# Altium PCB Room1.PcbDoc (part 1 of 2)
Units mil, origin at the board's own origin, x right, y up, seen from the top; angles counter-clockwise.
Board outline 3937.01 x 3937.01 mil, 2 copper layers (Top Layer, Bottom Layer); 51 components, 61 nets, 285 pads, 40 vias.
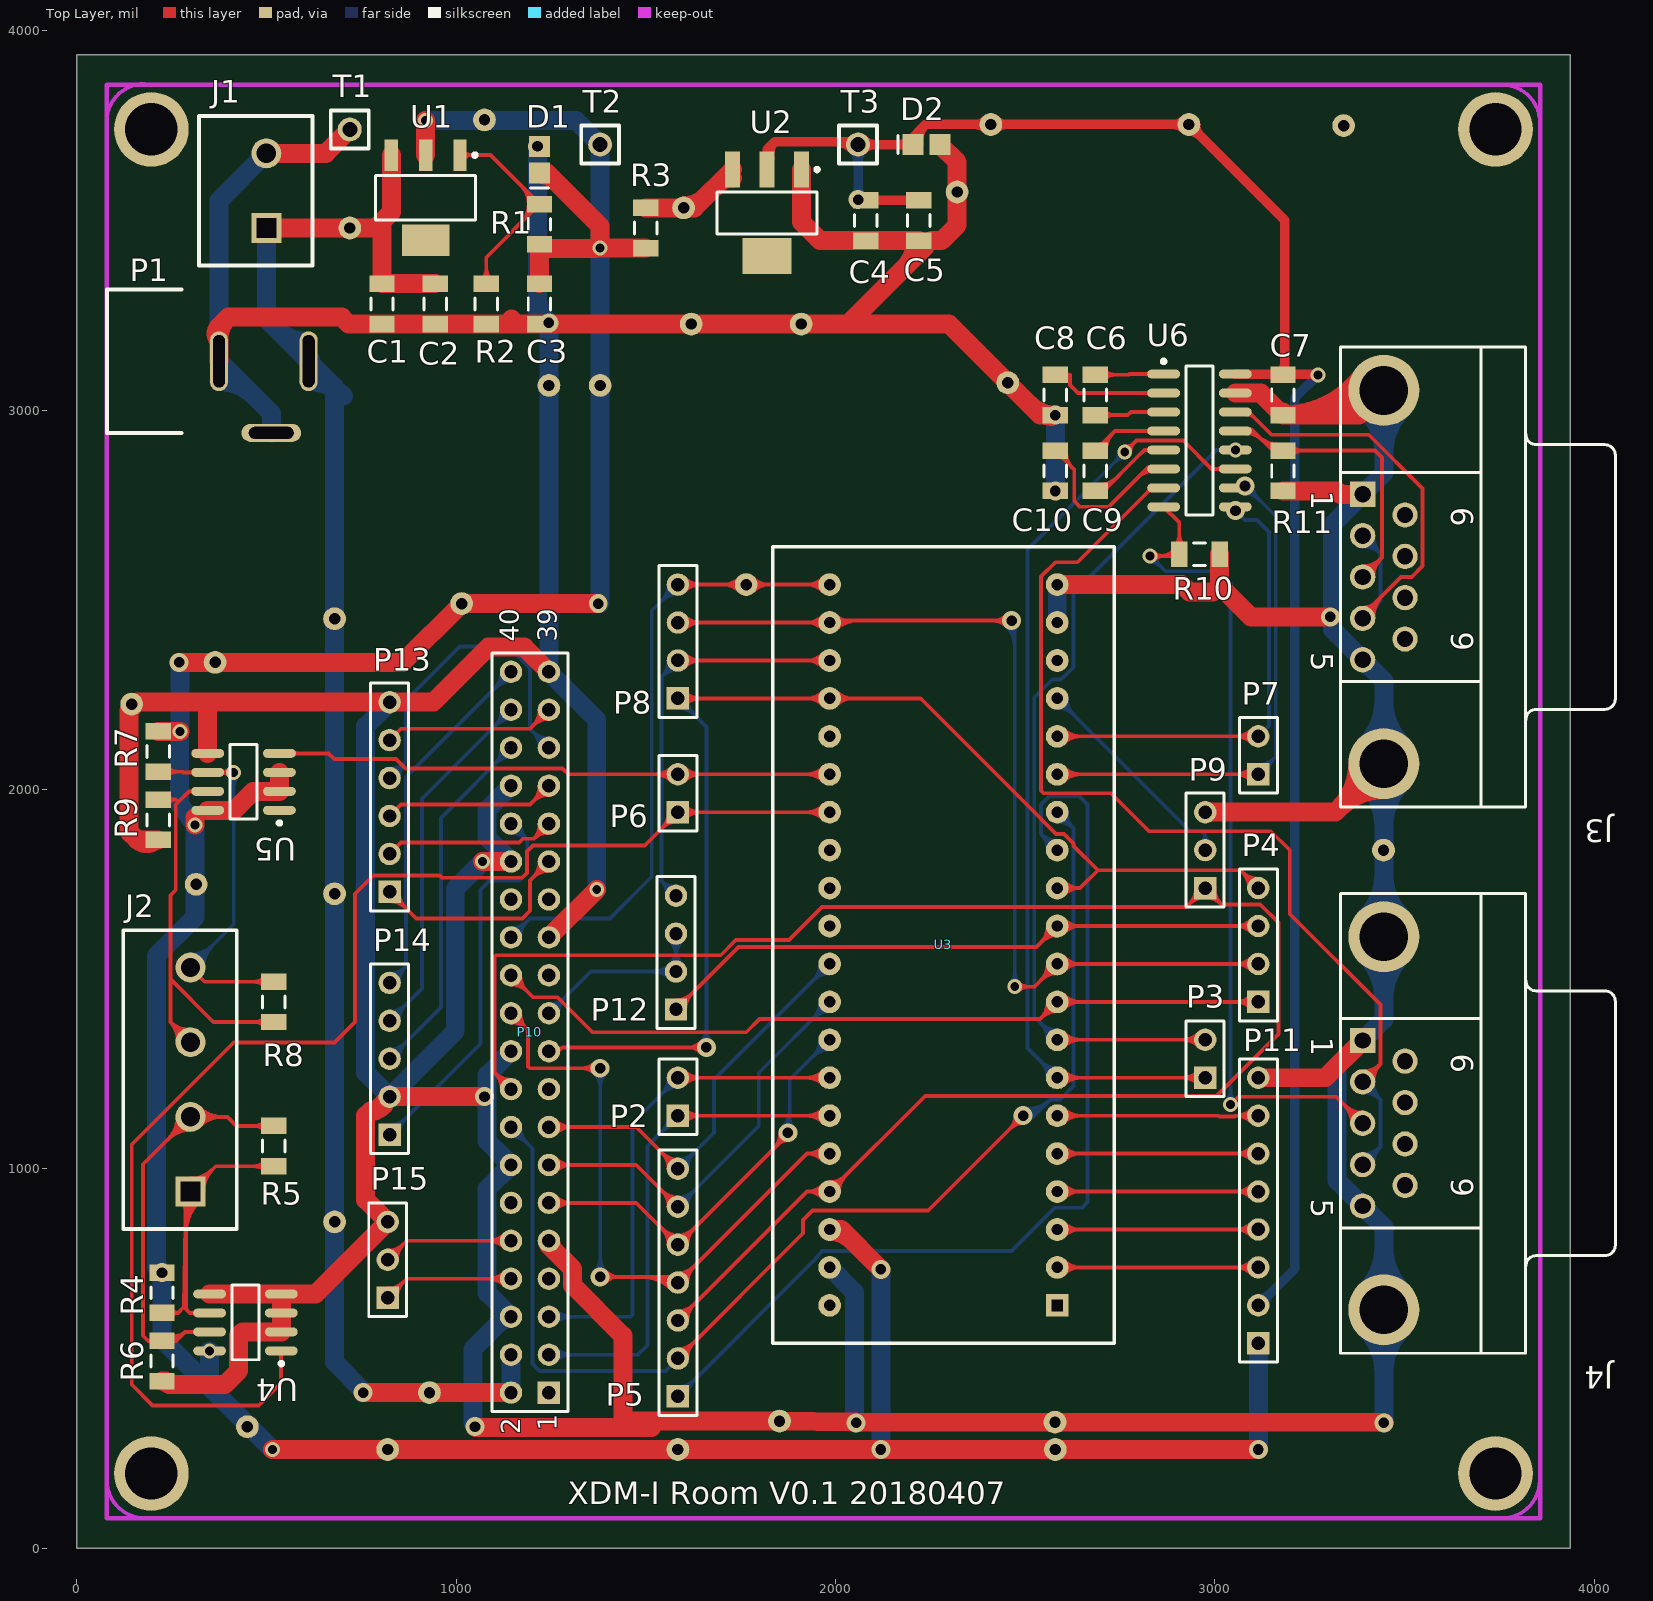
[diagram p0: Top Layer view]
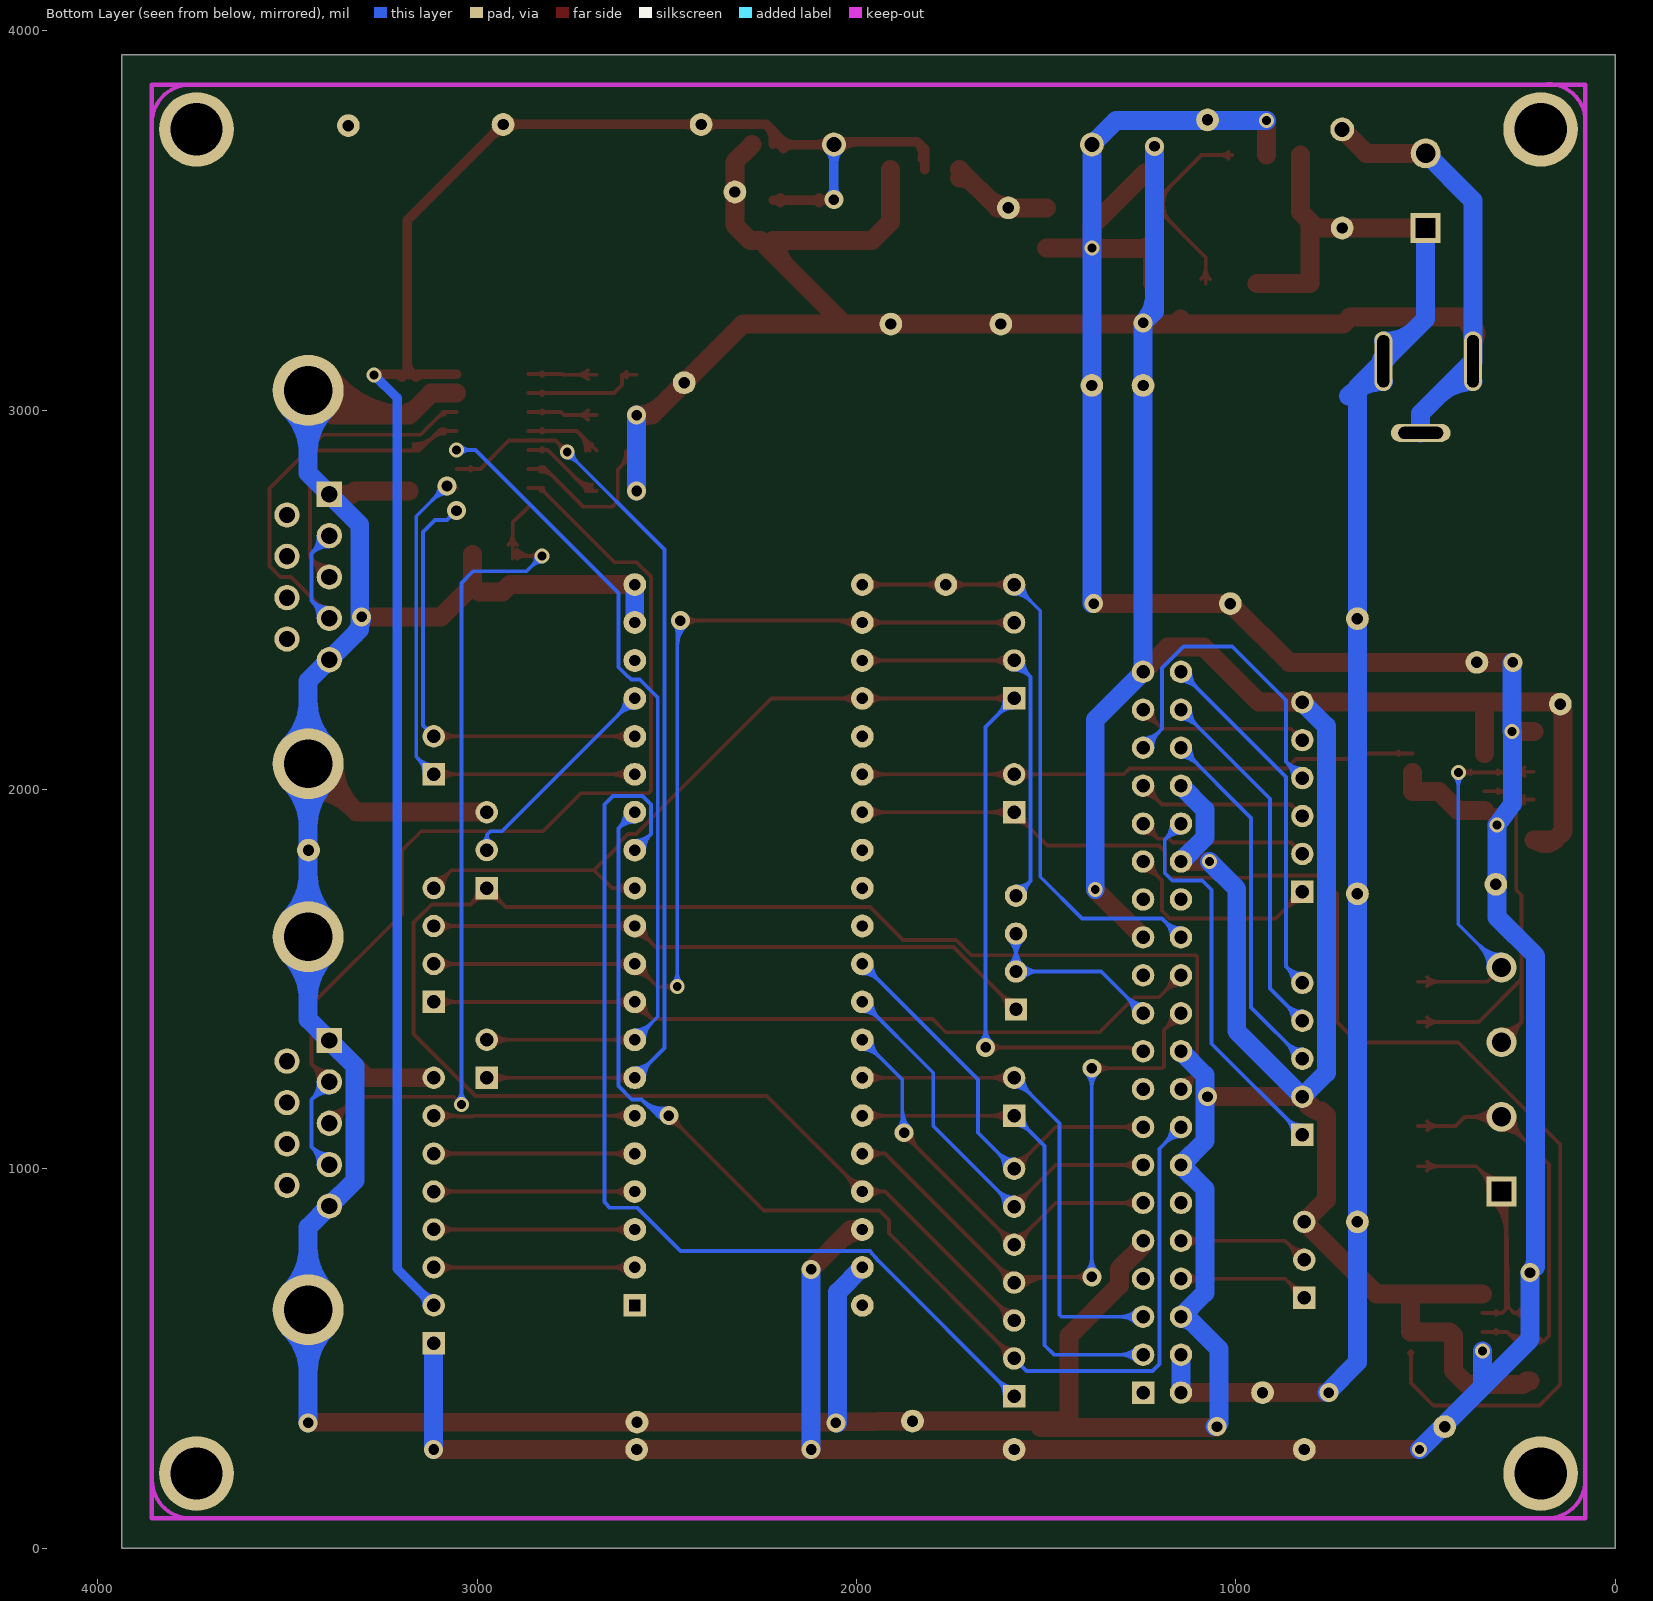
[diagram p1: Bottom Layer view, seen from below]

## Layer stack, top to bottom
Top Layer: signal copper 1.4
Dielectric: dielectric 12.6, FR-4, Dk 4.8
Bottom Layer: signal copper 1.4

## Board outline
0,0 3937.01,0 3937.01,3937.01 0,3937.01

## Design rules (kind name [scope] priority, off if disabled: settings)
Clearance [All] p1: gap=7.87
DiffPairsRouting [All] p1: maxlimit=10 minlimit=10 mostfreqgap=10 maxuncoupledlength=500
HoleSize [All] p1: absolutevalues=TRUE maxlimit=500 minlimit=1 maxpercent=80.000 minpercent=20.000
PolygonConnect [All] p1: connectstyle=Relief reliefconductorwidth=10 reliefentries=4 polygonreliefangle="90 Angle"
RoutingVias [All] p1: holewidth=23.62 width=39.37 viastyle="Through Hole" minholewidth=28 minwidth=50 maxholewidth=28 maxwidth=50
SilkscreenOverComponentPads [All] p1: minsilkscreentomaskgap=5
SolderMaskExpansion [All] p1: expansion=4
Width Width_4 [InNet('DC5')] p1: maxlimit=50 minlimit=10 preferedwidth=50
Width Width_3 [InNet('VCC3.3')] p2: maxlimit=50 minlimit=10 preferedwidth=25
Width Width_2 [InNet('GND')] p3: maxlimit=50 minlimit=10 preferedwidth=50
Width Width_1 [InNet('VCC5')] p4: maxlimit=50 minlimit=10 preferedwidth=50
Width [All] p5: maxlimit=50 minlimit=10 preferedwidth=10
25 further rules are at their usual default settings.

## Classes and differential pairs
component class Room485: J2 R4 R5 R6 R7 R8 R9 U4 U5
component class Power1: C1 C2 C3 C4 C5 D1 D2 J1 P1 R1 R2 R3 T1 T2 T3 U1 U2
component class Raspi: P10 P13 P14 P15
component class STM32F103: C6 C7 C8 C9 C10 J3 J4 P2 P3 P4 P5 P6 P7 P8 P9 P11 P12 R10 R11 S1 U3 U6
differential pair CON2: +CON2_P -CON2_N
differential pair CON1: +CON1_P -CON1_N

## Components (designator, comment, footprint, x,y, rotation, side; value= is the part's Value field where it differs from the comment)
C1 "Cap Semi" CAPC3216L 805,3280 r90 top
C2 "Cap Semi" CAPC3216L 945,3280 r90 top
C3 "Cap Semi" CAPC3216L 1220,3280 r90 top
C4 "Cap Semi" CAPC3216L 2080,3500 r90 top
C5 "Cap Semi" CAPC3216L 2220,3500 r90 top
C6 "Cap Semi" CAPC3216L 2685,3040 r270 top
C7 "Cap Semi" CAPC3216L 3180,3040 r270 top
C8 "Cap Semi" CAPC3216L 2580,3040 r90 top
C9 "Cap Semi" CAPC3216L 2685,2840 r270 top
C10 "Cap Semi" CAPC3216L 2580,2840 r90 top
D1 "LED0" CAPC2512L 1220,3660 r90 top
D2 "LED2" CAPC2512L 2240,3700 r0 top
J1 "KF301-2P" KF301-2P 500,3480 r90 top
J2 "KF301-4P" KF301-4P 300,940 r90 top
J3 "D Connector 9" DSUB1.385-2H9 3820,2560 r270 top
J4 "D Connector 9" DSUB1.385-2H9 3820,1120 r270 top
P1 "DC05" DC005 80,2940 r0 top
P2 "Header 2" HDR1X2 1585,1140 r90 top
P3 "Header 2" HDR1X2 2975,1240 r90 top
P4 "Header 4" HDR1X4 3115,1440 r90 top
P5 "Header 7" HDR1X7 1585,400 r90 top
P6 "Header 2" HDR1X2 1585,1940 r90 top
P7 "Header 2" HDR1X2 3115,2040 r90 top
P8 "Header 4" HDR1X4 1585,2240 r90 top
P9 "Header 3" HDR1X3 2975,1740 r90 top
P10 "Header 20X2" HDR2X20 1245,410 r90 top
P11 "Header 8" HDR1X8 3115,540 r90 top
P12 "Header 4" HDR1X4 1580,1420 r90 top
P13 "Header 6" HDR1X6 825,1730 r90 top
P14 "Header 5" HDR1X5 825,1090 r90 top
P15 "Header 3" HDR1X3 820,660 r90 top
R1 "Res Semi" RESC3216L 1220,3490 r270 top
R2 "Res Semi" RESC3216L 1080,3280 r90 top
R3 "Res Semi" RESC3216L 1500,3480 r90 top
R4 "Res Semi" RESC3216L 225,673.15 r90 top
R5 "Res Semi" RESC3216L 520,1060 r270 top
R6 "Res Semi" RESC3216L 225,493.15 r90 top
R7 "Res Semi" RESC3216L 215,2100 r90 top
R8 "Res Semi" RESC3216L 520,1440 r90 top
R9 "Res Semi" RESC3216L 215,1920 r90 top
R10 "Res Semi" RESC3216L 2960,2620 r180 top
R11 "Res Semi" RESC3216L 3180,2840 r90 top
T1 "TP1" TP1 720,3740 r0 top
T2 "TP1" TP1 1380,3700 r0 top
T3 "TP1" TP1 2060,3700 r0 top
U1 "LM317AEMP" MP04A_L 920,3560 r270 top
U2 "LM1117IMP-3.3" MP04A_N 1820,3520 r270 top
U3 "STM32F103" STM32F103C8T6 2585,2540 r270 top
U4 "MAX485CSA" NSO8_N 445,595 r180 top
U5 "MAX485CSA" NSO8_N 440,2020 r180 top
U6 "MAX3232CSE" NSO16_N 2960,2920 r0 top

## Footprints (in the part's own frame and the unit in brackets; to place one, negate y for a bottom-side part, rotate by r counter-clockwise, add the part's x,y. Pads: shape width x height; smd on the part's side, far side on the other; paste and mask are expansions set on the pad)
CAPC2512L [mm] "Chip Capacitor, Body 2.54x1.27mm, IPC High Density"
  rect 1.4x1.4 smd: 1(-0.9,0) 2(0.9,0)
  silkscreen extent -1.9,-0.6 -1.9,0.6, body extent -1.45,-0.82 1.45,0.82, height 1.3
CAPC3216L [mm] "Chip Capacitor, Body 3.2x1.6mm, IPC High Density"
  rect 1.1x1.7 smd: 1(-1.35,0) 2(1.35,0)
  silkscreen extent -0.4,-0.75 0.4,0.75, body extent -1.7,-0.9 1.7,0.9, height 1.3
DC005 [mm]
  oval 1.2x4 hole 0.8 slot 3.5 at 90 deg: 1(13.5,4.8) 3(7.5,4.8)
  oval 4x1.2 hole 0.8 slot 3 at 0 deg: 2(11,0)
  silkscreen extent 0,0 5,9.6
DSUB1.385-2H9 [mm] "Connector; D Subminiature; 9 Position; Right Angle; Pitch 1.385 mm"
  rect 1.69x1.69 hole 1.09: 1(-5.54,-10.92)
  round 1.69 hole 1.09: 2(-2.77,-10.92) 3(0,-10.92) 4(2.77,-10.92) 5(5.54,-10.92) 6(-4.155,-8.08) 7(-1.385,-8.08) 8(1.385,-8.08) 9(4.155,-8.08)
  round 4.76 hole 3.26: 10(-12.495,-9.5) 11(12.495,-9.5)
  silkscreen extent -15.4,-12.4 15.4,6
HDR1X2 [mm] "Connector; Header; 2 Position"
  rect 1.5x1.5 hole 0.9: 1(0,0)
  round 1.5 hole 0.9: 2(2.54,0)
  silkscreen extent -1.27,-1.27 3.81,1.27
HDR1X3 [mm] "Connector; Header; 3 Position"
  rect 1.5x1.5 hole 0.9: 1(0,0)
  round 1.5 hole 0.9: 2(2.54,0) 3(5.08,0)
  silkscreen extent -1.27,-1.27 6.35,1.27
HDR1X4 [mm] "Connector; Header; 4 Position"
  rect 1.5x1.5 hole 0.9: 1(0,0)
  round 1.5 hole 0.9: 2(2.54,0) 3(5.08,0) 4(7.62,0)
  silkscreen extent -1.27,-1.27 8.89,1.27
HDR1X5 [mm] "Connector; Header; 5 Position"
  rect 1.5x1.5 hole 0.9: 1(0,0)
  round 1.5 hole 0.9: 2(2.54,0) 3(5.08,0) 4(7.62,0) 5(10.16,0)
  silkscreen extent -1.27,-1.27 11.43,1.27
HDR1X6 [mm] "Connector; Header; 6 Position"
  rect 1.5x1.5 hole 0.9: 1(0,0)
  round 1.5 hole 0.9: 2(2.54,0) 3(5.08,0) 4(7.62,0) 5(10.16,0) 6(12.7,0)
  silkscreen extent -1.27,-1.27 13.97,1.27
HDR1X7 [mm] "Connector; Header; 7 Position"
  rect 1.5x1.5 hole 0.9: 1(0,0)
  round 1.5 hole 0.9: 2(2.54,0) 3(5.08,0) 4(7.62,0) 5(10.16,0) 6(12.7,0) 7(15.24,0)
  silkscreen extent -1.27,-1.27 16.51,1.27
HDR1X8 [mm] "Connector; Header; 8 Position"
  rect 1.5x1.5 hole 0.9: 1(0,0)
  round 1.5 hole 0.9: 2(2.54,0) 3(5.08,0) 4(7.62,0) 5(10.16,0) 6(12.7,0) 7(15.24,0) 8(17.78,0)
  silkscreen extent -1.27,-1.27 19.05,1.27
HDR2X20 [mm] "Connector; Header; 20x2 Position"
  rect 1.5x1.5 hole 0.9: 1(0,0)
  round 1.5 hole 0.9: 2(0,2.54) 3(2.54,0) 4(2.54,2.54) 5(5.08,0) 6(5.08,2.54) 7(7.62,0) 8(7.62,2.54) 9(10.16,0) 10(10.16,2.54) 11(12.7,0) 12(12.7,2.54) 13(15.24,0) 14(15.24,2.54) 15(17.78,0) 16(17.78,2.54) 17(20.32,0) 18(20.32,2.54) 19(22.86,0) 20(22.86,2.54) 21(25.4,0) 22(25.4,2.54) 23(27.94,0) 24(27.94,2.54) 25(30.48,0) 26(30.48,2.54) 27(33.02,0) 28(33.02,2.54) 29(35.56,0) 30(35.56,2.54) 31(38.1,0) 32(38.1,2.54) 33(40.64,0) 34(40.64,2.54) 35(43.18,0) 36(43.18,2.54) 37(45.72,0) 38(45.72,2.54) 39(48.26,0) 40(48.26,2.54)
  silkscreen extent -1.27,-1.27 49.53,3.81
KF301-2P [mm]
  rect 2x2 hole 1.3 square: 1(0,0)
  round 2 hole 1.3: 2(5,0)
  silkscreen extent -2.5,-3.1 7.5,4.5
KF301-4P [mm]
  rect 2x2 hole 1.3 square: 1(0,0)
  round 2 hole 1.3: 2(5,0) 3(10,0) 4(15,0)
  silkscreen extent -2.5,-3.1 17.5,4.5
MP04A_L [mm] "SOT223, 4-Leads, Body 6.5x3.5mm, Pitch 2.3mm, Lead Span 7mm, IPC High Density"
  rect 2.1x0.9 smd: 1(-2.85,2.3) 2(-2.85,0) 3(-2.85,-2.3)
  rect 2.1x3.2 smd: 4(2.85,0)
  silkscreen extent -2.97,-3.35 1.5,3.43, body extent -1.85,-3.35 1.85,3.35, height 1.8
MP04A_N [mm] "SOT223, 4-Leads, Body 6.5x3.5mm, Pitch 2.3mm, Lead Span 7mm, IPC Medium Density"
  rect 2.4x1 smd: 1(-2.9,2.3) 2(-2.9,0) 3(-2.9,-2.3)
  rect 2.4x3.3 smd: 4(2.9,0)
  silkscreen extent -3.02,-3.35 1.4,3.48, body extent -1.85,-3.35 1.85,3.35, height 1.8
NSO8_N [mm] "SOIC, 8-Leads, Body 4.9x3.9mm, Pitch 1.27mm, IPC Medium Density"
  oval 2.2x0.6 smd: 1(-2.4,1.905) 2(-2.4,0.635) 3(-2.4,-0.635) 4(-2.4,-1.905) 5(2.4,-1.905) 6(2.4,-0.635) 7(2.4,0.635) 8(2.4,1.905)
  silkscreen extent -2.53,-2.5 0.9,2.88, body extent -2,-2.5 2,2.5, height 1.75
NSO16_N [mm] "SOIC, 16-Leads, Body 9.9x3.9mm, Pitch 1.27mm, IPC Medium Density"
  oval 2.2x0.6 smd: 1(-2.4,4.445) 2(-2.4,3.175) 3(-2.4,1.905) 4(-2.4,0.635) 5(-2.4,-0.635) 6(-2.4,-1.905) 7(-2.4,-3.175) 8(-2.4,-4.445) 9(2.4,-4.445) 10(2.4,-3.175) 11(2.4,-1.905) 12(2.4,-0.635) 13(2.4,0.635) 14(2.4,1.905) 15(2.4,3.175) 16(2.4,4.445)
  silkscreen extent -2.52,-5 0.9,5.42, body extent -2,-5 2,5, height 1.75
RESC3216L [mm] "Chip Resistor, Body 3.1x1.6mm, IPC High Density"
  rect 1.1x1.7 smd: 1(-1.35,0) 2(1.35,0)
  silkscreen extent -0.4,-0.75 0.4,0.75, body extent -1.68,-0.87 1.68,0.87, height 2.54
STM32F103C8T6 [mil]
  rect 60x60 hole 30 square: 1(1900,0)
  round 60 hole 30: 2(1800,0) 3(1700,0) 4(1600,0) 5(1500,0) 6(1400,0) 7(1300,0) 8(1200,0) 9(1100,0) 10(1000,0) 11(900,0) 12(800,0) 13(700,0) 14(600,0) 15(500,0) 16(400,0) 17(300,0) 18(200,0) 19(100,0) 20(0,0) 21(1900,-600) 22(1800,-600) 23(1700,-600) 24(1600,-600) 25(1500,-600) 26(1400,-600) 27(1300,-600) 28(1200,-600) 29(1100,-600) 30(1000,-600) 31(900,-600) 32(800,-600) 33(700,-600) 34(600,-600) 35(500,-600) 36(400,-600) 37(300,-600) 38(200,-600) 39(100,-600) 40(0,-600)
  silkscreen extent -100,-750 2000,150
TP1 [mm] "Test Point 1"
  round 1.6 hole 1: 1(0,0)
  silkscreen extent -1.27,-1.27 1.27,1.27

## Part data
C1 C2 C3 C4 C5 C6 C7 C8 C9 C10: "Capacitor (Semiconductor SIM Model)"
D1: "Typical INFRARED GaAs LED"
D2: "Typical RED, GREEN, YELLOW, AMBER GaAs LED"
J3 J4: "Receptacle Assembly, 9 Position, Right Angle"
P1: library part "Header 3", "Header, 3-Pin"
P2 P3 P6 P7: "Header, 2-Pin"
P4 P8 P12: "Header, 4-Pin"
P5: "Header, 7-Pin"
P9 P15: "Header, 3-Pin"
P10: "Header, 20-Pin, Dual row"
P11: "Header, 8-Pin"
P13: "Header, 6-Pin"
P14: "Header, 5-Pin"
R1 R2 R3 R4 R5 R6 R7 R8 R9 R10 R11: "Semiconductor Resistor"
U1: "3-Terminal Adjustable Regulator"
U2: "800mA Low-Dropout Linear Regulator"
U3: library part STM32F103C8T6
U4 U5: "Low-Power, Slew-Rate-Limited RS-485/RS-422 Transceiver"
U6: "3.0V TO 5.5V, Low-Power, up to 1Mbps, True RS-232 Transceiver Using Four 0.1µF External Capacitor"

## Free pads (board coordinates)
  round 196.85 hole 137.8: 0(196.85,3740.16) 1(196.85,196.85) 2(3740.16,3740.16) 3(3740.16,196.85)
  round 60 hole 30: 0(1245,3065) 1(1380,3065) 2(2454.54,3072.16) 3(2410,3753) 4(680,2450) 5(365,2335) 6(365,2335) 7(315,1750) 8(930,410) 9(820,260) 10(1585,260) 11(1852.81,334.87) 12(2579.14,332.09) 13(2580,260) 14(3445,1840) 15(2321,3575) 16(1620,3226.85) 17(1600,3533.15) 18(720,3480) 19(1910,3226.85) 20(3340,3750) 21(2932,3753) 22(145,2225) 23(450,320) 24(680,860) 25(680,1725) 26(1015,2490) 27(1765,2540) 28(1075,3765)

## Via types
v1: diameter 50, hole 28, Top Layer to Bottom Layer, 25 vias
v2: diameter 39.37, hole 23.62, Top Layer to Bottom Layer, 15 vias

## Nets (pads, with @x,y where several pads share a name; then routed paths per layer and width w, separated by ;. In a path a pad name is that pad's centre, name@x,y a point inside that pad or via, vN(x,y) a via of type N, cw(c..) or ccw(c..) an arc to the next point about the centre after c; other vN are vias at no path point)
C1+: C6.1 U6.1 | length 270.3
  Top Layer w10: C6.1@2685,3093.15 2774,3093.15 2775.85,3095 U6.1@2865.51,3095 ; C6.1@2708.59,3081.37 cw(c2737.02,3052.94) 2737.02,3093.15 cw(c2737.02,3133.36) C6.1@2708.59,3104.93 ; U6.1@2829.2,3090.18 ccw(c2817.57,3078.56) 2817.57,3095 ccw(c2817.57,3111.44) U6.1@2829.2,3099.82
C1-: C6.2 U6.3 | length 272.9
  Top Layer w10: C6.2@2685,2986.85 2771,2986.85 2779.15,2995 U6.3@2865.51,2995 ; C6.2@2708.59,2975.07 cw(c2737.02,2946.64) 2737.02,2986.85 cw(c2737.02,3027.06) C6.2@2708.59,2998.63 ; U6.3@2829.2,2990.18 ccw(c2817.57,2978.56) 2817.57,2995 ccw(c2817.57,3011.44) U6.3@2829.2,2999.82
C2+: C9.1 U6.4 | length 325.4
  Top Layer w10: C9.1@2685,2893.15 2685.3,2893.15 2737.15,2945 U6.4@2865.51,2945 ; C9.1@2696.81,2909.8 ccw(c2696.81,2922.22) C9.1@2705.59,2913.44 ; C9.1@2703.46,2893.15 cw(c2747.32,2893.15) 2716.31,2924.16 ; C9.1@2713.46,2893.15 cw(c2781.46,2893.15) 2733.38,2941.23 ; U6.4@2829.2,2940.18 ccw(c2817.57,2928.56) 2817.57,2945 ccw(c2817.57,2961.44) U6.4@2829.2,2949.82
C2-: C9.2 U6.5 | length 346.1
  Top Layer w10: C9.2@2685,2786.85 2706.9,2786.85 2795.56,2875.51 ; C9.2@2696.81,2793.5 ccw(c2696.81,2833.91) 2725.39,2805.34 ; C9.2@2696.81,2803.5 ccw(c2696.81,2868.06) 2742.46,2822.41 ; C9.2@2713.46,2786.85 cw(c2729.32,2786.85) C9.2@2718.11,2798.06 ; 2795.56,2875.56 2815,2895 U6.5@2865.51,2895 ; U6.5@2829.2,2890.18 ccw(c2817.57,2878.56) 2817.57,2895 ccw(c2817.57,2911.44) U6.5@2829.2,2899.82
CON1_N: J2.2 R5.1 R6.2 U4.7 | length 1745.9
  Top Layer w10: R6.2@197.7,540.18 ccw(c188.7,536.62) 188.7,546.3 ; R6.2@197.7,552.42 cw(c188.7,555.98) 188.7,546.3 ; R6.2@235.52,543.21 ccw(c245.64,567.47) 264.22,548.89 ; R6.2@239.37,552.44 ccw(c251.85,582.37) 274.78,559.44 ; R6.2@243.22,561.67 ccw(c258.06,597.27) 285.33,570 ; R6.2@252.22,539.99 cw(c261.63,536.13) 261.63,546.3 ; R6.2@252.22,552.61 ccw(c261.63,556.47) 261.63,546.3 ; J2.2@265.63,1136.85 cw(c182.65,1136.85) 241.33,1078.18 cw(c300,1019.5) J2.2@300,1102.48 ; J2.2@275.63,1136.85 cw(c216.8,1136.85) 258.4,1095.25 cw(c300,1053.65) J2.2@300,1112.48 ; U4.7@314.2,565.18 ccw(c302.57,553.56) 302.57,570 ccw(c302.57,586.44) U4.7@314.2,574.82 ; J2.2@317.23,1119.62 cw(c358.83,1078.02) 358.83,1136.85 cw(c358.83,1195.68) J2.2@317.23,1154.08 ; J2.2@324.3,1112.55 cw(c382.98,1053.87) 382.98,1136.85 cw(c382.98,1219.83) J2.2@324.3,1161.15 ; U4.7@350.51,570 285.33,570 ; R5.1@496.41,1101.37 ccw(c467.98,1072.94) 467.98,1113.15 ccw(c467.98,1153.36) R5.1@496.41,1124.93 ; R5.1@520,1113.15 421.7,1113.15 398,1136.85 J2.2@300,1136.85 175,1011.85 175,560 188.7,546.3 ; 188.7,546.3 R6.2@225,546.3 261.63,546.3 ; 261.63,546.3 285.33,570
CON1_P: J2.1 R4.1 R5.2 U4.6 | length 1951.3
  Top Layer w10: R4.1@225,620 267,620 ; R4.1@250.9,611.12 cw(c267,600.97) 267,620 ; R4.1@250.9,628.88 ccw(c267,639.03) 267,620 ; J2.1@275.24,916.16 cw(c244.43,886.48) 287.2,885.67 ; J2.1@275.7,915.7 cw(c245.99,885.99) 288,885.99 ; 286.14,828.84 cw(c409.28,826.53) J2.1@323.84,915.24 ; 286.59,852.98 cw(c385.6,851.12) J2.1@316.91,922.45 ; 287.04,877.12 cw(c361.92,875.71) J2.1@309.97,929.65 ; J2.1@287.5,901.26 cw(c338.23,900.3) J2.1@303.03,936.85 ; 288,828.05 cw(c411.95,828.05) J2.1@324.3,915.7 ; 288,852.19 cw(c387.81,852.19) J2.1@317.23,922.77 ; 288,876.34 cw(c363.66,876.34) J2.1@310.16,929.84 ; 288,900.48 cw(c339.52,900.48) J2.1@303.09,936.91 ; J2.1@300,964.37 ccw(c300,1023.2) 341.6,981.6 ccw(c383.2,940) J2.1@324.37,940 ; J2.1@300,974.37 ccw(c300,1057.35) 358.67,998.67 ccw(c417.35,940) J2.1@334.37,940 ; U4.6@314.2,615.18 ccw(c302.57,603.56) 302.57,620 ccw(c302.57,636.44) U4.6@314.2,624.82 ; U4.6@350.51,620 298,620 288,630 J2.1@288,928 ; R5.2@496.41,995.07 ccw(c467.98,966.64) 467.98,1006.85 ccw(c467.98,1047.06) R5.2@496.41,1018.63 ; R5.2@520,1006.85 366.85,1006.85 J2.1@300,940 J2.1@288,928 ; 267,620 282.5,635.5 J2.1@288,928
CON2_N: J2.3 R8.1 R9.2 U5.7 | length 1840.2
  Top Layer w10: R9.2@215,1973.15 261.34,1973.15 ; R9.2@239.84,1962.78 cw(c261.34,1945.68) 261.34,1973.15 ; R9.2@239.84,1983.52 ccw(c261.34,2000.62) 261.34,1973.15 ; J2.3@265.73,1336.26 ccw(c201.37,1341.06) 247,1386.7 ; J2.3@275.7,1335.51 ccw(c230.07,1338.92) 262.42,1371.28 ccw(c294.78,1403.63) J2.3@298.19,1358 ; J2.3@297.44,1367.97 cw(c292.64,1432.33) 247,1386.7 ; J2.3@300,1333.7 247,1386.7 ; U5.7@309.2,1990.18 ccw(c297.57,1978.56) 297.57,1995 ccw(c297.57,2011.44) U5.7@309.2,1999.82 ; U5.7@345.51,1995 296.34,1995 ; R8.1@496.41,1375.07 ccw(c467.98,1346.64) 467.98,1386.85 ccw(c467.98,1427.06) R8.1@496.41,1398.63 ; R8.1@520,1386.85 360.15,1386.85 247,1500 ; 247,1386.7 247,1500 ; 247,1386.7 247,1500 ; 247,1500 247,1721 ; 247,1500 247,1721 ; 247,1721 261.34,1735.34 261.34,1960 ; 261.34,1960 267.92,1966.58 ; 261.34,1960 267.92,1966.58 ; 261.34,1973.15 267.92,1966.58 ; 267.92,1966.58 296.34,1995 ; 267.92,1966.58 296.34,1995
CON2_P: J2.4 R7.1 R8.2 U5.6 | length 1509
  Top Layer w10: R7.1@215,2046.85 279,2046.85 280.85,2045 U5.6@345.51,2045 v2(414,2045) ; R7.1@238.59,2035.07 cw(c267.02,2006.64) 267.02,2046.85 cw(c267.02,2087.06) R7.1@238.59,2058.63 ; J2.4@300,1530.55 337.4,1493.15 R8.2@520,1493.15 ; U5.6@309.2,2040.18 ccw(c297.57,2028.56) 297.57,2045 ccw(c297.57,2061.44) U5.6@309.2,2049.82 ; U5.6@381.82,2040.18 cw(c393.45,2028.56) 393.45,2045 cw(c393.45,2061.44) U5.6@381.82,2049.82 ; v2@403.62,2034.62 ccw(c378.55,2009.55) 378.55,2045 ccw(c378.55,2080.45) v2@403.62,2055.38 ; R8.2@496.41,1481.37 ccw(c467.98,1452.94) 467.98,1493.15 ccw(c467.98,1533.36) R8.2@496.41,1504.93
  Bottom Layer w10: J2.4@300,1530.55 414,1644.55 v2(414,2045) ; J2.4@300,1554.92 ccw(c300,1613.76) 341.6,1572.15 ccw(c383.2,1530.55) J2.4@324.37,1530.55 ; J2.4@300,1564.92 ccw(c300,1647.9) 358.67,1589.23 ccw(c417.35,1530.55) J2.4@334.37,1530.55 ; v2@403.62,2034.62 cw(c378.55,2009.55) 414,2009.55 cw(c449.45,2009.55) v2@424.38,2034.62
DC5: C1.2 C2.2 J1.1 P1.1 P10.2 P10.4 pad.4 pad.8 pad.18 pad.24 pad.25 U1.3 | length 4685.7
  Top Layer w50: J1.1@500,3480 787.45,3480 805,3497.55 ; v1(755,410) P10.2@1145,410 ; U1.3@829.45,3672.2 829.45,3522 805,3497.55 ; C2.2@945,3333.15 C1.2@805,3333.15 805,3497.55
  Bottom Layer w50: J1.1@500,3480 500,3240.47 680,3060.47 680,490 v1@760,410 ; 527.56,3212.91 ccw(c601.6,3286.95) P1.1@611.63,3182.72 ; P1.1@602.54,3137.94 ccw(c614.76,3150.16) P1.1@616.42,3132.95 ; P1.1@611.5,3075.24 cw(c611.5,2945.5) 703.24,3037.24 ; P1.1@611.5,3125.24 cw(c611.5,3116.21) P1.1@617.88,3122.59 ; P10.2@1145,410 P10.4@1145,510
GND: C1.1 C2.1 C3.1 C4.1 C5.1 C7.2 C8.1 C10.1 D1.2 D2.2 J1.2 J3.1 J3.5 J3.10 J3.11 J4.1 J4.5 J4.10 J4.11 P1.2 P1.3 P9.3 P10.6 P10.9 P10.14 P10.20 P10.25 P10.30 P10.34 P10.39 P11.8 P13.6 P14.2 P15.3 pad.0@1245,3065 pad.2@2454.54,3072.16 pad.11 pad.12 pad.14 pad.15 pad.16 pad.19 pad.22 R2.1 R6.1 R9.1 R10.1 R11.1 T1.1 U2.1 U3.19 U3.20 U3.22 U4.2 U4.3 U4.4 U4.5 U5.5 U6.15 | length 25805.5
  Top Layer w50: 159.6,1867.25 ccw(c184.16,1891.82) R9.1@205.22,1864.19 ; R9.1@215,1866.85 160,1866.85 138,1888.85 138,2208 160,2230 P13.6@825,2230 940,2230 1085,2375 1180,2375 P10.39@1245,2310 ; R6.1@225,440 234.57,440 243.47,431.09 390.09,431.09 427,468 427,560 437,570 U4.2@539.49,570 U4.3@539.49,620 U4.4@539.49,670 ; U5.5@345.51,2095 345.51,2229.49 ; U4.5@350.51,670 U4.4@539.49,670 ; P1.3@373.9,3184.09 cw(c457.92,3184.09) 398.51,3243.51 ; P1.3@374.25,3183.18 cw(c394.37,3201.18) 375.28,3220.28 ; P1.3@375.28,3128.98 375.28,3220.28 ; J1.2@500,3676.85 656.85,3676.85 T1.1@720,3740 ; P14.2@820.55,1190.81 cw(c774,1199.31) 774,1152 ; v1@1052,318 1515,318 ; v2(1070,1810) P10.30@1145,1810 ; v1(1075,1190) P14.2@825,1190 787,1152 774,1152 ; 1146.34,3240 1159.49,3226.85 ; P10.9@1245,810 1245,798.25 1307.4,735.85 1307.4,692.6 1440,560 1440,335 pad.11@1840,335 ; P10.25@1245,1610 v2(1371,1736) ; P10.9@1249.53,810 ccw(c1288.83,810) 1261.04,782.21 ; pad.11@1846,335 pad.11@1840,335 ; U2.1@1910.55,3634.17 1910.55,3496.3 1960,3446.85 C4.1@2080,3446.85 C5.1@2220,3446.85 ; 2182.11,3375.81 ccw(c2111.07,3446.85) C5.1@2211.54,3446.85 ; C5.1@2236.57,3430.27 2033.15,3226.85 ; C5.1@2253.15,3446.85 2280,3446.85 2321,3487.85 2321,3654.43 D2.2@2275.43,3700 ; 2511.46,3015.24 ccw(c2580,3083.78) v1(2580,2986.85) ; 2525.52,3001.18 ccw(c2568.19,3043.84) C8.1@2568.19,2983.5 ; 2539.85,2986.85 2299.85,3226.85 2033.15,3226.85 ; U3.20@2585,2540 2914,2540 2934,2520 2995.75,2520 3013.15,2537.4 ; P9.3@2975,1940 3317.91,1940 J3.11@3445.98,2068.07 ; R10.1@3013.15,2620 3013.15,2537.4 ; U6.15@3054.49,3045 3121.85,3045 C7.2@3180,2986.85 ; P11.8@3115,1240 3291.97,1240 J4.1@3390.08,1338.11 ; R11.1@3180,2786.85 3322.52,2786.85 3331.26,2778.11 J3.1@3390.08,2778.11 ; C7.2@3180,2994.56 C7.2@3180,2986.85 ; 3279.42,2986.85 ccw(c3279.42,3175.61) J3.10@3430.97,3063.08 ; v1(3305,2455) 3095.55,2455 3013.15,2537.4 ; J3.11@3377.28,2068.07 cw(c3211.42,2068.07) 3328.7,1950.79 cw(c3445.98,1833.51) J3.11@3445.98,1999.37 ; J3.10@3390.83,3092.89 cw(c3180.01,3249.43) C7.2@3180,2986.85 ; v1@3445.98,330.98 2055,332.76 pad.11@1840,335 ; J3.10@3445.98,3051.93 3380.9,2986.85 C7.2@3180,2986.85 ; 375.28,3220.28 400,3245 699,3245 717.15,3226.85 C1.1@805,3226.85 C2.1@945,3226.85 R2.1@1080,3226.85 1159.49,3226.85 ; U4.4@539.49,670 630,670 P15.3@820,860 762,918 762,1140 774,1152 ; 1159.49,3226.85 C3.1@1220,3226.85 2033.15,3226.85
  Bottom Layer w50: P1.3@375.28,3075.24 cw(c375.28,2945.5) 467.02,3037.24 ; P1.3@375.28,3125.24 cw(c375.28,3116.21) P1.3@381.66,3122.59 ; J1.2@500,3676.85 375.28,3552.13 P1.3@375.28,3128.98 513.07,2991.18 P1.2@513.07,2940 ; P13.6@825,2230 762,2167 762,1253 P14.2@825,1190 998,1363 998,1738 v2(1070,1810) ; v1@1055,320 1045,330 1045,525 1130,610 P10.6@1145,610 1082,673 1082,947 P10.14@1145,1010 1082,1073 1082,1247 P10.20@1145,1310 ; 1111.66,591.66 cw(c1145,558.33) P10.6@1145,605.47 ; P10.30@1145,1810 1082,1873 1082,1947 P10.34@1145,2010 ; 1215,3302.43 ccw(c1317.43,3302.43) v1(1245,3230) ; v1(1215,3695.43) 1215,3260 v1(1245,3230) ; v2(1371,1736) 1371,2184 P10.39@1245,2310 v1(1245,3230) ; U3.22@1985,740 2050,675 v1@2050,330 ; v1(2580,2786.85) v1(2580,2986.85) ; U3.19@2585,2440 U3.20@2585,2540 ; v1(3305,2455) ccw(c3372.68,2455) 3324.82,2407.15 ; J4.11@3397.41,579.49 cw(c3280.13,462.21) 3445.98,462.21 cw(c3611.84,462.21) J4.11@3494.56,579.49 ; J4.11@3397.41,676.65 ccw(c3280.13,793.93) 3445.98,793.93 ccw(c3611.84,793.93) J4.11@3494.56,676.65 ; J4.10@3397.41,1563.35 cw(c3280.13,1446.07) 3445.98,1446.07 cw(c3611.84,1446.07) J4.10@3494.56,1563.35 ; J4.10@3397.41,1660.51 ccw(c3280.13,1777.79) 3445.98,1777.79 ccw(c3611.84,1777.79) J4.10@3494.56,1660.51 ; J3.11@3397.41,2019.49 cw(c3280.13,1902.21) 3445.98,1902.21 cw(c3611.84,1902.21) J3.11@3494.56,2019.49 ; J3.11@3397.41,2116.65 ccw(c3280.13,2233.93) 3445.98,2233.93 ccw(c3611.84,2233.93) J3.11@3494.56,2116.65 ; J3.10@3397.41,3003.35 cw(c3280.13,2886.07) 3445.98,2886.07 cw(c3611.84,2886.07) J3.10@3494.56,3003.35 ; v1(3445.98,330) J4.11@3445.98,628.07 3445.98,845.98 J4.5@3390.08,901.89 3323,968.97 3323,1271.03 J4.1@3390.08,1338.11 3445.98,1394.02 J4.10@3445.98,1611.93 J3.11@3445.98,2068.07 3445.98,2285.98 J3.5@3390.08,2341.89 3310,2421.97 3310,2698.03 J3.1@3390.08,2778.11 3445.98,2834.02 J3.10@3445.98,3051.93
  other v1: 1050,320 2055,330
GR2S1: P5.1 U3.13 | length 2920.6
  Bottom Layer w10: P5.1@1585,400 1942,757 1965,783 2464,783 2578,897 2650,897 2665.13,912.13 2665.13,1960 2642.25,1982.87 2565,1982.87 2542.13,1960 2542.13,1882.87 U3.13@2585,1840 ; P5.1@1585,414.53 ccw(c1585,449.6) 1609.8,424.8 ccw(c1634.6,400) P5.1@1599.53,400 ; P5.1@1585,424.53 ccw(c1585,483.74) 1626.87,441.87 ccw(c1668.74,400) P5.1@1609.53,400 ; U3.13@2560,1840 ccw(c2499.64,1840) 2542.32,1882.68 ccw(c2585,1925.36) U3.13@2585,1865 ; U3.13@2570,1840 ccw(c2533.79,1840) 2559.39,1865.61 ccw(c2585,1891.21) U3.13@2585,1855
GR2S2: P5.2 P10.16 U3.14 | length 3924.9
  Top Layer w10: P5.2@1585,500 1915,830 1915,865 1940,890 2245,890 v1(2495,1140) ; P5.2@1585,514.53 ccw(c1585,549.6) 1609.8,524.8 ccw(c1634.6,500) P5.2@1599.53,500 ; P5.2@1585,524.53 ccw(c1585,583.74) 1626.87,541.87 ccw(c1668.74,500) P5.2@1609.53,500 ; v1@2475,1140 cw(c2426.72,1140) 2460.86,1105.86 cw(c2495,1071.72) v1@2495,1120
  Bottom Layer w10: P10.16@1145,1085.47 cw(c1145,1026.26) 1186.87,1068.13 cw(c1228.74,1110) P10.16@1169.53,1110 ; P10.16@1145,1095.47 cw(c1145,1060.4) 1169.8,1085.2 cw(c1194.6,1110) P10.16@1159.53,1110 ; P10.16@1145,1110 1202,1053 1202,485 1220,467 1552,467 P5.2@1585,500 ; v1@2493.57,1130.1 ccw(c2498.83,1166.57) 2524.88,1140.52 ; v1@2496.43,1149.9 ccw(c2505.95,1215.92) 2553.12,1168.75 ; v1@2497.85,1159.8 ccw(c2509.51,1240.6) 2567.24,1182.87 ; v1@2513.61,1132.67 cw(c2524.37,1128.44) 2524.37,1140 ; v1@2513.61,1147.33 ccw(c2524.37,1151.56) 2524.37,1140 ; 2539,1154.63 cw(c2502.39,1191.25) v1(2495,1140) 2524.37,1140 ; U3.14@2585,1915 cw(c2585,1854.64) 2627.68,1897.32 cw(c2670.36,1940) U3.14@2610,1940 ; U3.14@2585,1925 cw(c2585,1888.79) 2610.61,1914.39 cw(c2636.21,1940) U3.14@2600,1940 ; U3.14@2585,1940 2628,1897 2628,1218 2592.87,1182.87 2567.24,1182.87 ; 2524.37,1140 2567.24,1182.87
GR2S3: P5.3 P9.1 P10.18 U3.24 | length 5630.2
  Top Layer w10: P10.18@1120.47,1210 ccw(c1061.26,1210) 1103.13,1251.87 ccw(c1145,1293.74) P10.18@1145,1234.53 ; P10.18@1130.47,1210 ccw(c1095.4,1210) 1120.2,1234.8 ccw(c1145,1259.6) P10.18@1145,1224.53 ; P10.18@1145,1210 1102,1253 1102,1560 1105,1563 1697.72,1563 1737.6,1602.87 1877.87,1602.87 1965,1690 2925,1690 P9.1@2975,1740 3018,1697 3120,1697 3168,1649 3168,1355 3005,1192 2237,1192 U3.24@1985,940 1925,940 ; P5.3@1585,600 1925,940 ; P5.3@1585,614.53 ccw(c1585,649.6) 1609.8,624.8 ccw(c1634.6,600) P5.3@1599.53,600 ; P5.3@1585,624.53 ccw(c1585,683.74) 1626.87,641.87 ccw(c1668.74,600) P5.3@1609.53,600 ; U3.24@1967.25,922.4 ccw(c1925,880.51) 1925,940 ; U3.24@1967.25,957.6 cw(c1925,999.49) 1925,940 ; U3.24@1974.35,929.44 ccw(c1949,904.3) 1949,940 ccw(c1949,975.7) U3.24@1974.35,950.56 ; U3.24@1985,955 ccw(c1985,991.21) 2010.61,965.61 ccw(c2036.21,940) U3.24@2000,940 ; U3.24@1985,965 ccw(c1985,1025.36) 2027.68,982.68 ccw(c2070.36,940) U3.24@2010,940 ; P9.1@2950.47,1740 cw(c2891.26,1740) 2933.13,1698.13 cw(c2975,1656.26) 2975,1715.47 cw(c2975,1656.26) 3016.87,1698.13 cw(c3058.74,1740) P9.1@2999.53,1740 ; P9.1@2960.47,1740 cw(c2925.4,1740) 2950.2,1715.2 cw(c2975,1690.4) 2975,1725.47 cw(c2975,1690.4) 2999.8,1715.2 cw(c3024.6,1740) P9.1@2989.53,1740
GR2S4: P5.4 P10.22 U3.25 | length 2606
  Top Layer w10: P10.22@1145,1385.47 cw(c1145,1326.26) 1186.87,1368.13 cw(c1228.74,1410) P10.22@1169.53,1410 ; P10.22@1145,1395.47 cw(c1145,1360.4) 1169.8,1385.2 cw(c1194.6,1410) P10.22@1159.53,1410 ; P10.22@1145,1410 1190,1365 1190,1270 1195,1265 v1(1380,1265) ; v1@1365.86,1250.86 ccw(c1331.72,1216.72) 1331.72,1265 ccw(c1331.72,1313.28) v1@1365.86,1279.14 ; v1(1380,715) 1570,715 P5.4@1585,700 1925,1040 ; v1@1394.14,700.86 cw(c1428.28,666.72) 1428.28,715 cw(c1428.28,763.28) v1@1394.14,729.14 ; 1489.57,715 cw(c1489.57,604.57) P5.4@1567.66,682.66 ; 1513.71,715 cw(c1513.71,628.71) P5.4@1574.73,689.73 ; 1537.86,715 cw(c1537.86,652.86) P5.4@1581.8,696.8 ; P5.4@1585,714.53 ccw(c1585,749.6) 1609.8,724.8 ccw(c1634.6,700) P5.4@1599.53,700 ; P5.4@1585,724.53 ccw(c1585,783.74) 1626.87,741.87 ccw(c1668.74,700) P5.4@1609.53,700 ; U3.25@1967.25,1022.4 ccw(c1925,980.51) 1925,1040 ; U3.25@1967.25,1057.6 cw(c1925,1099.49) 1925,1040 ; U3.25@1974.35,1029.44 ccw(c1949,1004.3) 1949,1040 ccw(c1949,1075.7) U3.25@1974.35,1050.56 ; U3.25@1985,1040 1925,1040
  Bottom Layer w10: v1@1365.86,729.14 ccw(c1331.72,763.28) 1380,763.28 ccw(c1428.28,763.28) v1@1394.14,729.14 ; v1@1365.86,1250.86 cw(c1331.72,1216.72) 1380,1216.72 cw(c1428.28,1216.72) v1@1394.14,1250.86 ; v1(1380,715) v1(1380,1265)
GR5: P10.29 P13.1 | length 854.2
  Top Layer w10: P13.1@825,1705.47 cw(c825,1646.26) 866.87,1688.13 cw(c908.74,1730) P13.1@849.53,1730 ; P13.1@825,1715.47 cw(c825,1680.4) 849.8,1705.2 cw(c874.6,1730) P13.1@839.53,1730 ; P13.1@825,1730 895,1660 1175,1660 1195,1680 1195,1760 P10.29@1245,1810 ; P10.29@1220.47,1810 cw(c1161.26,1810) 1203.13,1768.13 cw(c1245,1726.26) P10.29@1245,1785.47 ; P10.29@1230.47,1810 cw(c1195.4,1810) 1220.2,1785.2 cw(c1245,1760.4) P10.29@1245,1795.47
GR6: P10.31 P13.2 | length 589.7
  Top Layer w10: P13.2@825,1830 855,1860 1166.85,1860 1177.13,1870.28 1205.28,1870.28 ; P10.31@1220.49,1909.07 cw(c1168.46,1907.09) 1205.28,1870.28 ; P10.31@1230.48,1909.45 cw(c1199.67,1908.28) 1221.47,1886.47 cw(c1243.28,1864.67) P10.31@1244.45,1895.48 ; P10.31@1244.07,1885.49 ccw(c1242.09,1833.46) 1205.28,1870.28 ; P10.31@1245,1910 1205.28,1870.28
GR12: P10.32 P14.1 | length 1330.7
  Bottom Layer w10: P14.1@825,1090 1064.75,1329.75 1064.75,1735.75 1089,1760 1168,1760 1188,1780 1188,1867 P10.32@1145,1910 ; P14.1@825,1104.53 ccw(c825,1139.6) 849.8,1114.8 ccw(c874.6,1090) P14.1@839.53,1090 ; P14.1@825,1114.53 ccw(c825,1173.74) 866.87,1131.87 ccw(c908.74,1090) P14.1@849.53,1090 ; P10.32@1145,1885.47 cw(c1145,1826.26) 1186.87,1868.13 cw(c1228.74,1910) P10.32@1169.53,1910 ; P10.32@1145,1895.47 cw(c1145,1860.4) 1169.8,1885.2 cw(c1194.6,1910) P10.32@1159.53,1910
GR13: P10.33 P13.3 | length 601.2
  Top Layer w10: P13.3@825,1930 855,1960 1195,1960 P10.33@1245,2010 ; P10.33@1220.47,2010 cw(c1161.26,2010) 1203.13,1968.13 cw(c1245,1926.26) P10.33@1245,1985.47 ; P10.33@1230.47,2010 cw(c1195.4,2010) 1220.2,1985.2 cw(c1245,1960.4) P10.33@1245,1995.47
GR16: P10.36 P14.3 | length 1248.8
  Bottom Layer w10: P14.3@825,1290 960.13,1425.13 960.13,1925.13 P10.36@1145,2110 ; P14.3@825,1304.53 ccw(c825,1339.6) 849.8,1314.8 ccw(c874.6,1290) P14.3@839.53,1290 ; P14.3@825,1314.53 ccw(c825,1373.74) 866.87,1331.87 ccw(c908.74,1290) P14.3@849.53,1290 ; P10.36@1120.47,2110 cw(c1061.26,2110) 1103.13,2068.13 cw(c1145,2026.26) P10.36@1145,2085.47 ; P10.36@1130.47,2110 cw(c1095.4,2110) 1120.2,2085.2 cw(c1145,2060.4) P10.36@1145,2095.47
GR19: P10.35 P13.4 | length 1159.2
  Bottom Layer w10: P13.4@825,2030 868,2073 868,2235 1010,2377 1138,2377 1195,2320 1195,2160 P10.35@1245,2110 ; P13.4@825,2044.53 ccw(c825,2079.6) 849.8,2054.8 ccw(c874.6,2030) P13.4@839.53,2030 ; P13.4@825,2054.53 ccw(c825,2113.74) 866.87,2071.87 ccw(c908.74,2030) P13.4@849.53,2030 ; P10.35@1220.47,2110 ccw(c1161.26,2110) 1203.13,2151.87 ccw(c1245,2193.74) P10.35@1245,2134.53 ; P10.35@1230.47,2110 ccw(c1195.4,2110) 1220.2,2134.8 ccw(c1245,2159.6) P10.35@1245,2124.53
GR20: P10.38 P14.4 | length 1248.8
  Bottom Layer w10: P14.4@825,1390 910.52,1475.52 910.52,1975.52 P10.38@1145,2210 ; P14.4@825,1404.53 ccw(c825,1439.6) 849.8,1414.8 ccw(c874.6,1390) P14.4@839.53,1390 ; P14.4@825,1414.53 ccw(c825,1473.74) 866.87,1431.87 ccw(c908.74,1390) P14.4@849.53,1390 ; P10.38@1120.47,2210 cw(c1061.26,2210) 1103.13,2168.13 cw(c1145,2126.26) P10.38@1145,2185.47 ; P10.38@1130.47,2210 cw(c1095.4,2210) 1120.2,2185.2 cw(c1145,2160.4) P10.38@1145,2195.47
GR21: P10.40 P14.5 | length 1248.8
  Bottom Layer w10: P14.5@825,1490 868,1533 868,2033 P10.40@1145,2310 ; P14.5@825,1504.53 ccw(c825,1539.6) 849.8,1514.8 ccw(c874.6,1490) P14.5@839.53,1490 ; P14.5@825,1514.53 ccw(c825,1573.74) 866.87,1531.87 ccw(c908.74,1490) P14.5@849.53,1490 ; P10.40@1120.47,2310 cw(c1061.26,2310) 1103.13,2268.13 cw(c1145,2226.26) P10.40@1145,2285.47 ; P10.40@1130.47,2310 cw(c1095.4,2310) 1120.2,2285.2 cw(c1145,2260.4) P10.40@1145,2295.47
GR26: P10.37 P13.5 | length 601.2
  Top Layer w10: P13.5@825,2130 855,2160 1195,2160 P10.37@1245,2210 ; P10.37@1220.47,2210 cw(c1161.26,2210) 1203.13,2168.13 cw(c1245,2126.26) P10.37@1245,2185.47 ; P10.37@1230.47,2210 cw(c1195.4,2210) 1220.2,2185.2 cw(c1245,2160.4) P10.37@1245,2195.47
GS2R1: P5.5 P10.11 U3.28 | length 1892.7
  Top Layer w10: P10.11@1245,910 1475,910 P5.5@1585,800 v1@1875,1090 ; P10.11@1255.27,899.73 cw(c1280.07,874.93) 1280.07,910 cw(c1280.07,945.07) P10.11@1255.27,920.27 ; P10.11@1262.34,892.66 cw(c1304.21,850.79) 1304.21,910 cw(c1304.21,969.21) P10.11@1262.34,927.34 ; P5.5@1560.47,800 ccw(c1501.26,800) 1543.13,841.87 ccw(c1585,883.74) 1585,824.53 ccw(c1585,883.74) 1626.87,841.87 ccw(c1668.74,800) P5.5@1609.53,800 ; P5.5@1570.47,800 ccw(c1535.4,800) 1560.2,824.8 ccw(c1585,849.6) 1585,814.53 ccw(c1585,849.6) 1609.8,824.8 ccw(c1634.6,800) P5.5@1599.53,800 ; 1837.32,1052.32 ccw(c1794.64,1095) v1@1855,1095 ; 1849.39,1064.39 cw(c1875,1038.79) v1@1875,1075 ; 1854.39,1069.39 ccw(c1828.79,1095) v1@1865,1095
  Bottom Layer w10: v1@1860.86,1109.14 ccw(c1814.64,1155.36) 1880,1155.36 ; v1@1867.93,1102.07 ccw(c1838.79,1131.21) 1880,1131.21 ccw(c1911.21,1131.21) v1@1889.14,1109.14 ; v1@1880,1095 1880,1235 U3.28@1985,1340 ; U3.28@1960,1340 cw(c1899.64,1340) 1942.32,1297.32 cw(c1985,1254.64) U3.28@1985,1315 ; U3.28@1970,1340 cw(c1933.79,1340) 1959.39,1314.39 cw(c1985,1288.79) U3.28@1985,1325
  other v1: 1875,1095
GS2R2: P5.6 P10.13 U3.29 | length 1687.3
  Top Layer w10: P10.13@1245,1010 1475,1010 P5.6@1585,900 ; P10.13@1255.27,999.73 cw(c1280.07,974.93) 1280.07,1010 cw(c1280.07,1045.07) P10.13@1255.27,1020.27 ; P10.13@1262.34,992.66 cw(c1304.21,950.79) 1304.21,1010 cw(c1304.21,1069.21) P10.13@1262.34,1027.34 ; P5.6@1560.47,900 ccw(c1501.26,900) 1543.13,941.87 ccw(c1585,983.74) P5.6@1585,924.53 ; P5.6@1570.47,900 ccw(c1535.4,900) 1560.2,924.8 ccw(c1585,949.6) P5.6@1585,914.53
  Bottom Layer w10: P5.6@1585,900 1798,1113 1798,1253 U3.29@1985,1440 ; P5.6@1585,914.53 ccw(c1585,949.6) 1609.8,924.8 ccw(c1634.6,900) P5.6@1599.53,900 ; P5.6@1585,924.53 ccw(c1585,983.74) 1626.87,941.87 ccw(c1668.74,900) P5.6@1609.53,900 ; U3.29@1960,1440 cw(c1899.64,1440) 1942.32,1397.32 cw(c1985,1354.64) U3.29@1985,1415 ; U3.29@1970,1440 cw(c1933.79,1440) 1959.39,1414.39 cw(c1985,1388.79) U3.29@1985,1425